# Altium PCB ESP-WROOM32.PcbDoc (part 3 of 3)
Units mm, origin at the board's own origin, x right, y up, seen from the top; angles counter-clockwise.
Board outline 17.3 x 15.5 mm, 2 copper layers (L1, L2); 42 components, 55 nets, 176 pads, 91 vias.
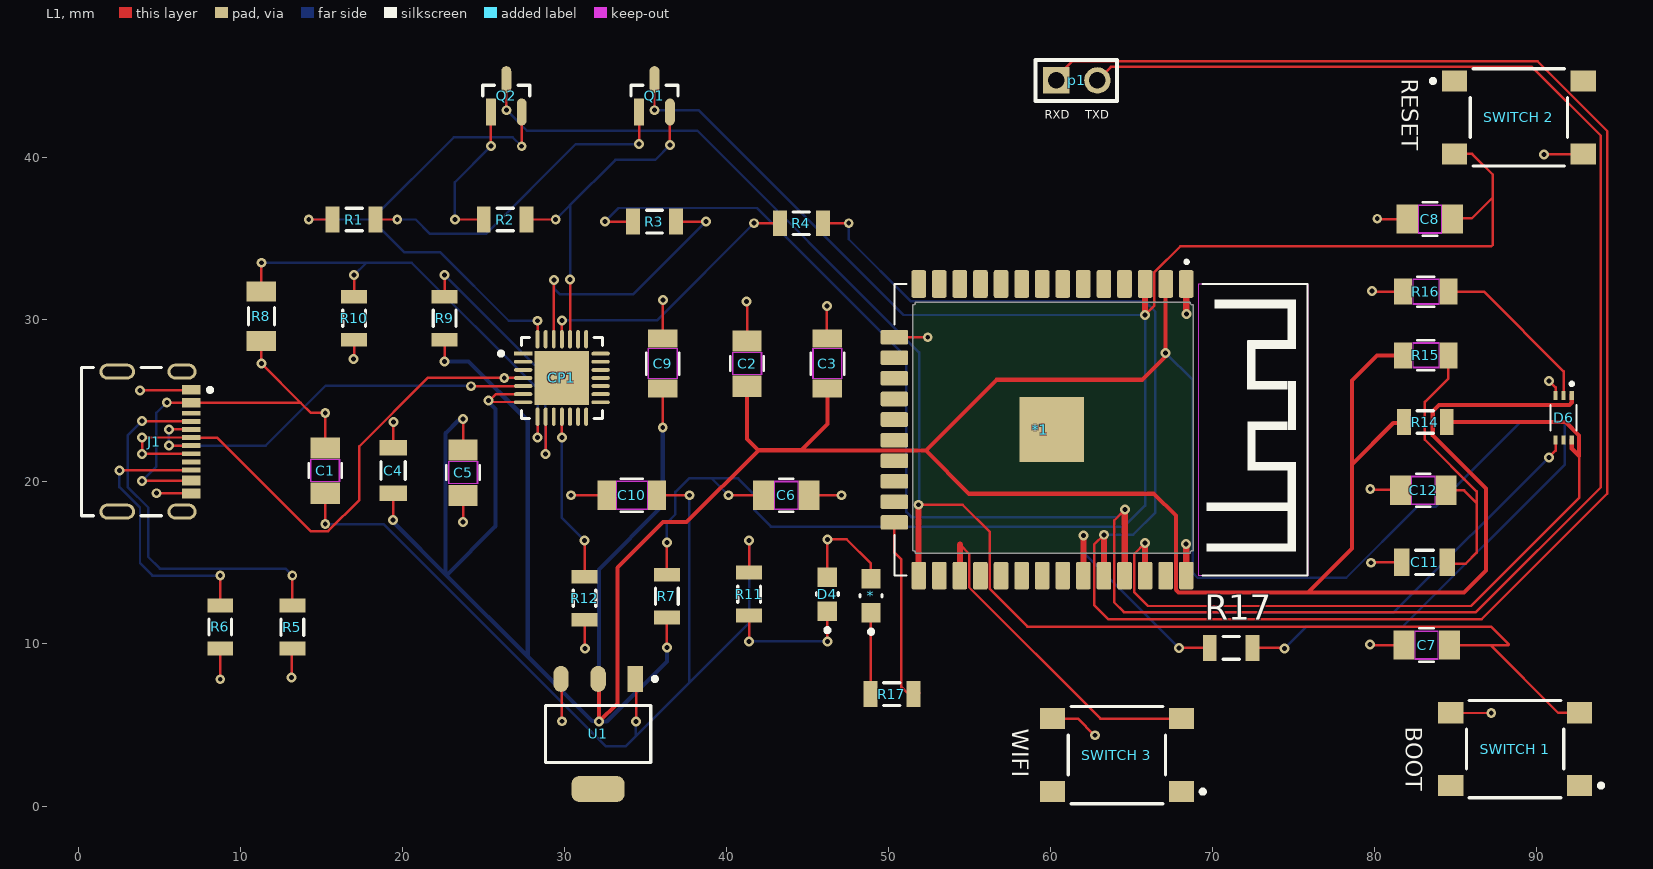
[diagram p0: L1 view]

## Via types
v1: diameter 0.61, hole 0.305, L1 to L2, 91 vias

## Nets (pads, with @x,y where several pads share a name; then routed paths per layer and width w, separated by ;. In a path a pad name is that pad's centre, name@x,y a point inside that pad or via, vN(x,y) a via of type N, cw(c..) or ccw(c..) an arc to the next point about the centre after c; other vN are vias at no path point) (continued)
NetJ1_A5: (continued)
  L1 w0.152: v1(3.939,23.763) 3.953,23.749 J1.A5@6.969,23.749 ; R5.2 v1(13.208,14.224)
  L2 w0.152: v1(3.939,23.763) 3.048,22.872 3.048,19.685 4.318,18.415 4.318,15.367 5.035,14.65 12.782,14.65 v1(13.208,14.224)
NetJ1_B5: J1.B5 R6.2 | length 17.8
  L1 w0.152: v1(2.542,20.715) 2.552,20.725 J1.B5@6.965,20.725 ; R6.2 v1(8.763,14.218)
  L2 w0.152: v1(2.542,20.715) 2.542,19.683 3.81,18.415 3.81,14.986 4.578,14.218 v1(8.763,14.218)
NetQ1_1: Q1.1 R1.2 | length 21
  L1 w0.152: R1.2 v1@19.812,36.195 ; v1(34.61,40.848) Q1.1
  L2 w0.152: v1(19.685,36.195) 20.828,36.195 21.717,35.306 25.158,35.306 30.701,40.848 v1(34.61,40.848)
NetQ2_1: Q2.1 R2.2 | length 8.6
  L1 w0.152: v1@23.368,36.195 R2.2 ; v1(25.466,40.721) Q2.1@25.466,42.195
  L2 w0.152: v1(23.241,36.195) 23.241,38.496 v1(25.466,40.721)
RXD0: *1.34 p1.1 R4.2 | length 140.5
  L1 w0.152: R4.2 v1(47.549,35.966) ; p1.1@60.325,44.577 60.325,44.958 61.316,45.949 90.066,45.949 94.361,41.654 94.361,19.279 86.614,11.532 63.551,11.532 62.687,12.395 62.687,16.129 v1(63.297,16.739)
  L1 w0.381: *1.34@63.297,14.597 v1(63.297,16.739)
  L2 w0.152: v1(47.549,35.966) 47.549,34.976 51.384,31.14 65.837,31.14 66.472,30.505 66.472,18.11 65.1,16.739 v1(63.297,16.739)
SD0: *1.21
SD1: *1.22
SD2: *1.17
SD3: *1.18
SENSOR_VN: *1.5
SENSOR_VP: *1.4
TXD0: *1.35 p1.2 R3.2 | length 145.9
  L1 w0.152: v1(32.512,36.068) R3.2 ; p1.2@62.89,44.983 63.093,44.983 63.728,45.618 89.713,45.618 93.955,41.377 93.955,19.66 86.258,11.963 64.529,11.963 63.932,12.561 63.932,17.628 v1(64.592,18.288)
  L1 w0.381: *1.35@64.554,14.533 64.579,14.559 64.579,18.275 v1(64.592,18.288)
  L2 w0.152: v1(32.512,36.068) 33.35,36.906 41.885,36.906 51.105,27.686 51.105,18.136 51.41,17.831 64.135,17.831 v1(64.592,18.288)
VBUS: C1.1 J1.A4-B9 J1.B4-A9 R8.1 | length 25.5
  L1 w0.152: v1(3.937,20.066) 6.956,20.066 J1.B4-A9 ; v1(5.463,24.906) 5.48,24.889 J1.A4-B9 13.719,24.889 ; R8.1 v1(11.303,27.305) 13.719,24.889 ; C1.1 v1(15.24,24.257) 14.351,24.257 13.719,24.889
  L2 w0.152: v1(3.937,20.066) 4.826,20.955 4.826,24.269 v1(5.463,24.906)
VDD33: *1.2 C2.2 C3.2 C4.2 C5.2 C9.2 CP1.6 CP1.7 D6.1 R7.2 R9.1 R14.2 R15.2 R17.2@72.47,9.754 U1.2 | length 318.2
  L1 w0.152: v1(19.431,17.653) C4.2 ; v1(22.606,27.432) R9.1 ; C5.2 v1(23.749,23.876) ; CP1.7 27.437,24.933 25.41,24.933 v1(25.324,25.019) 25.392,25.019 25.789,25.416 CP1.6 ; v1(36.068,23.368) C9.2 ; v1(36.322,9.779) R7.2 ; R17.2@72.47,9.754 74.447,9.754 v1@74.473,9.779
  L1 w0.254: v1(32.131,5.207) U1.2@32.131,7.459 ; v1@32.141,5.207 33.274,6.34 33.274,14.707 36.093,17.526 37.541,17.526 41.968,21.953 ; C2.2 41.275,22.646 41.968,21.953 ; C3.2 46.228,23.586 44.594,21.953 ; *1.2 67.107,27.752 65.659,26.304 56.667,26.304 52.306,21.943 ; 75.222,13.178 75.89,13.178 ; 75.225,13.181 67.908,13.181 67.742,13.347 67.742,17.922 66.396,19.268 54.98,19.268 52.306,21.943 ; R15.2@81.752,27.803 80.137,27.803 78.602,26.268 78.602,21.086 ; R14.2@81.799,23.688 81.747,23.636 81.152,23.636 78.602,21.086 ; D6.1 92.169,24.904 92.02,24.755 83.972,24.755 83.591,24.374 83.591,22.875 86.868,19.599 86.868,14.529 85.517,13.178 75.89,13.178 ; 41.968,21.953 44.594,21.953 ; 44.594,21.953 44.679,21.953 44.689,21.943 52.306,21.943 ; 75.89,13.178 78.602,15.89 78.602,21.086
  L2 w0.152: v1(67.107,27.965) 68.783,26.289 68.783,14.386 69.081,14.089 78.248,14.089 82.614,18.455 83.759,18.455 89.002,23.698 91.656,23.698 91.745,23.609 91.745,21.082 81.737,11.074 75.794,11.074 v1(74.447,9.728)
  L2 w0.254: v1(19.431,17.653) 19.431,17.529 19.592,17.368 19.592,17.365 22.722,14.235 ; v1(22.606,27.432) 24.079,27.432 27.737,23.774 27.737,9.22 ; 22.671,14.286 22.671,23.001 23.478,23.808 23.681,23.808 v1(23.749,23.876) ; v1(25.324,25.019) 25.324,24.923 25.756,24.491 25.756,17.269 22.722,14.235 ; v1(36.068,23.368) 36.068,18.542 32.131,14.605 v1(32.131,5.207) ; v1(36.322,9.779) 36.322,8.915 32.614,5.207 v1(32.131,5.207) ; 22.722,14.235 27.737,9.22 ; 27.737,9.22 31.716,5.241 32.097,5.241 v1(32.131,5.207)
pads on no net: "SWITCH 1.1" "SWITCH 1.2" "SWITCH 2.1" "SWITCH 2.2" "SWITCH 3.1" "SWITCH 3.2" *1.1.1 CP1.1 CP1.2 CP1.3 CP1.10 CP1.12 CP1.13 CP1.14 CP1.15 CP1.16 CP1.17 CP1.18 CP1.19 CP1.20 CP1.21 CP1.22 CP1.23 CP1.27 CP1.29 D6.5 J1.1 J1.2 J1.3 J1.4 J1.A8 J1.B8 U1.4

## Polygon pours and split planes (outlines as drawn)
GND on L2 "GND_L02_P000" (solid, pour order 0): -0.178,0.076 0.051,0.305 0.051,46.228 94.615,46.228 94.717,46.33 94.818,46.228 94.818,-0.102

## Silkscreen, mask and mechanical layers (free items; w line width, h text height)
Top Overlay:
  text "RESET" at 81.686,44.882 h1.02 r270
  text "RXD" at 59.639,42.418 h0.51
  text "TXD" at 62.154,42.418 h0.51
  text "BOOT" at 81.915,4.877 h1.02 r270
  text "WIFI" at 57.633,4.775 h1.02 r270
Mechanical 1:
  lines w1.2: 0,0 94.742,-0.254 94.742,46.228 0,46.228 0,0